# Altium PCB LORA_NODE2.PcbDoc
Units mil, origin at the board's own origin, x right, y up, seen from the top; angles counter-clockwise.
Board outline 3070.87 x 1574.8 mil, 2 copper layers (Top Layer, Bottom Layer); 109 components, 85 nets, 348 pads, 38 vias.
Unrouted connection lines stored in the file: 44.
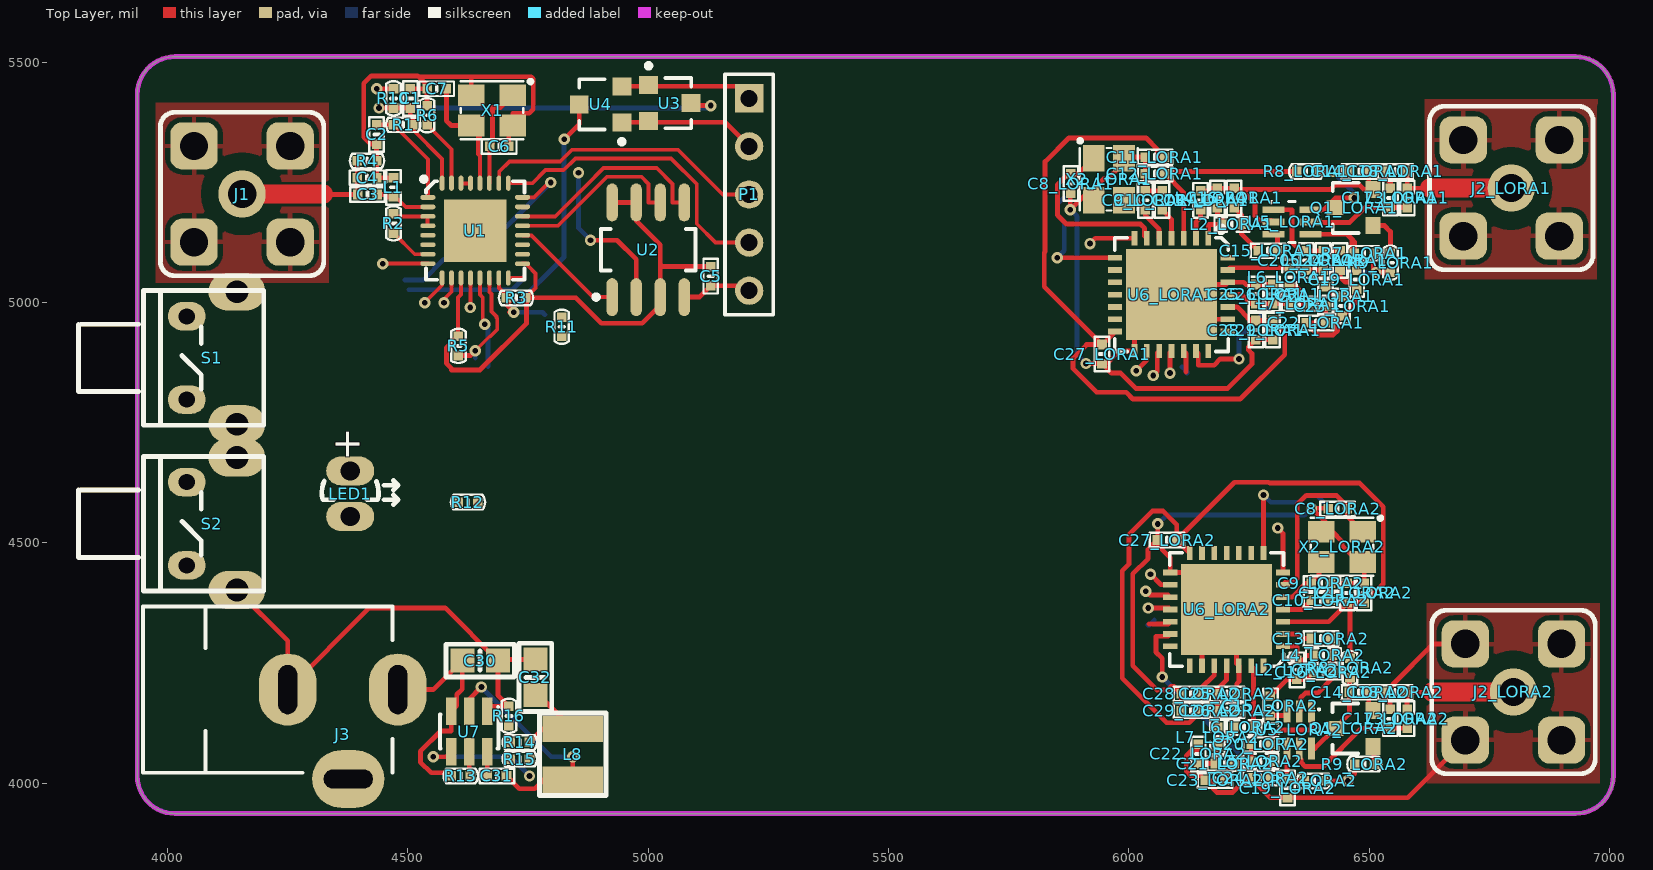
[diagram p0: Top Layer view]
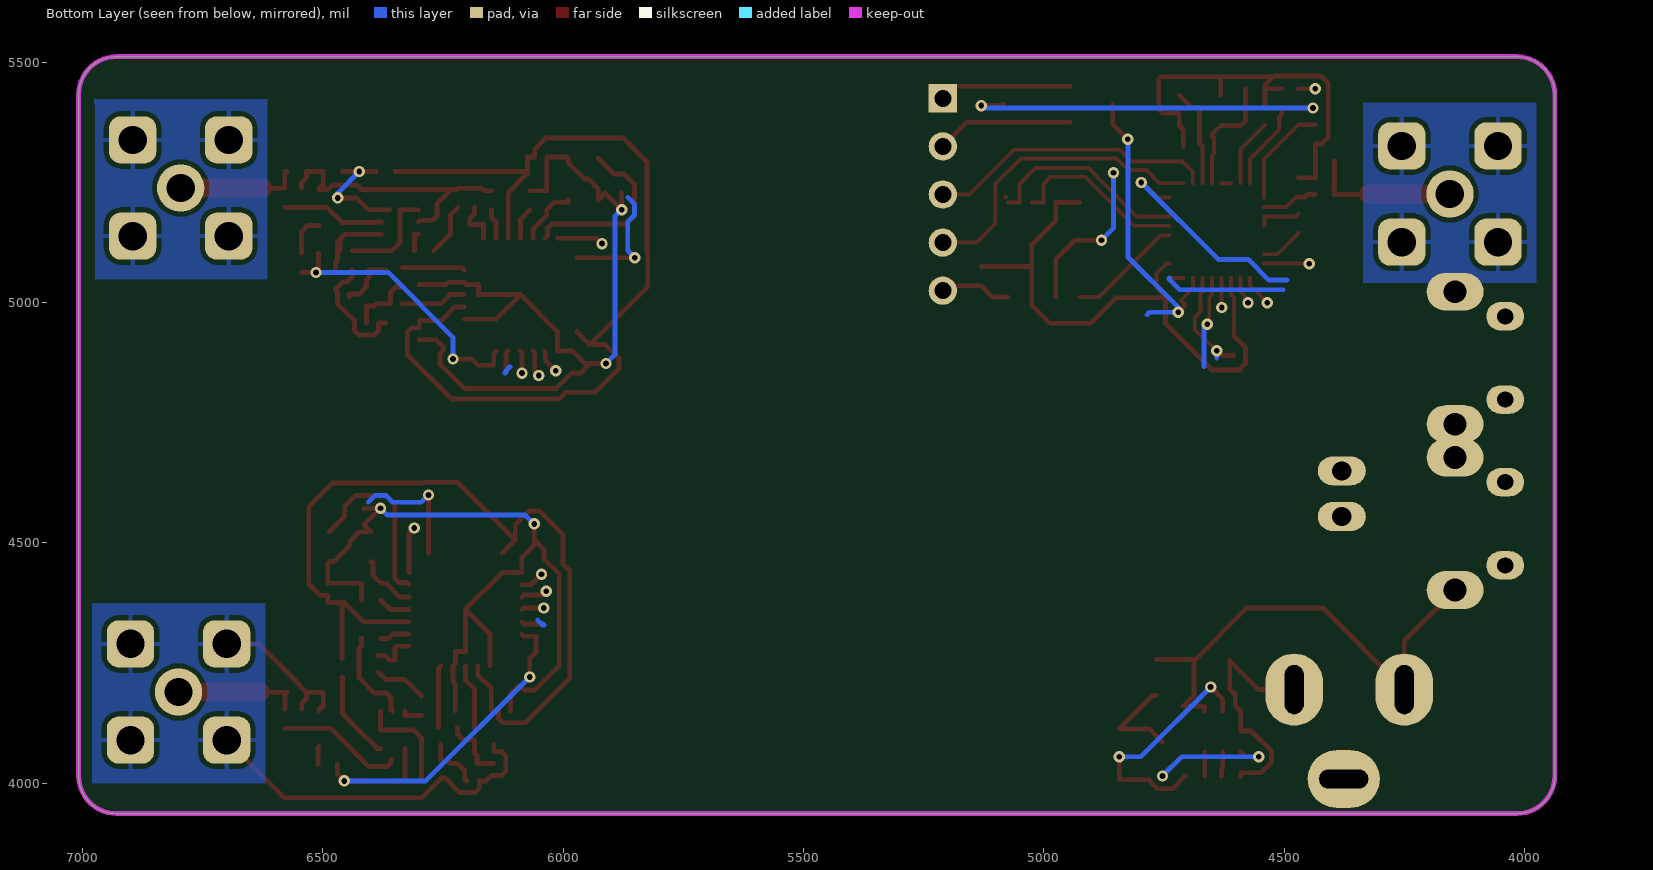
[diagram p1: Bottom Layer view, seen from below]
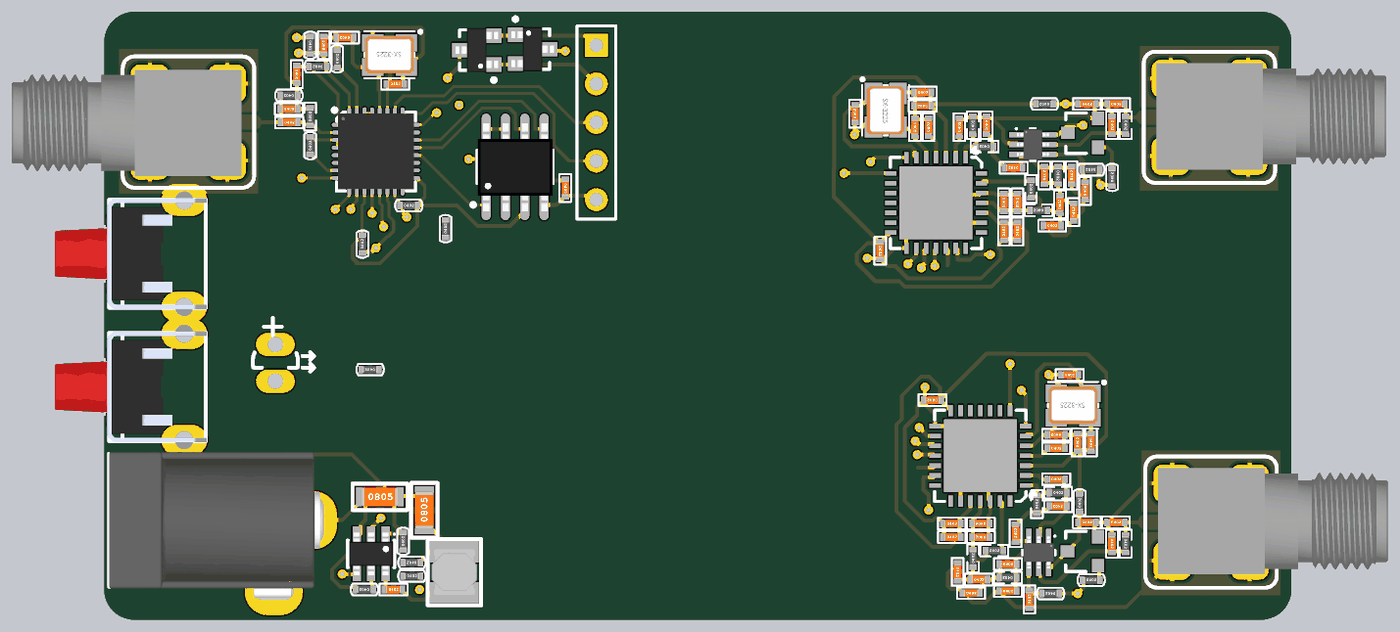
[diagram p2: 3D render of the assembled board from above, using the file's embedded part models]

## Layer stack, top to bottom
Top Solder: solder mask 0.4, Solder Resist, Dk 3.5
Top Layer: signal copper 1.4
Dielectric 1: dielectric 12.6, FR-4, Dk 4.8
Bottom Layer: signal copper 1.4
Bottom Solder: solder mask 0.4, Solder Resist, Dk 3.5

## Board outline
3937.01,4015.75 3937.01,5433.07 cw(c4015.75,5433.07) 4015.75,5511.81 6929.13,5511.81 cw(c6929.13,5433.07) 7007.87,5433.07 7007.87,4015.75 cw(c6929.13,4015.75) 6929.13,3937.01 4015.75,3937.01 cw(c4015.75,4015.75)

## Design rules (kind name [scope] priority, off if disabled: settings)
Clearance [All] p1: gap=10 ignorepadtopadclearanceinfootprint=TRUE except(6: Track-Poly)
PolygonConnect [All] p1: connectstyle=Relief reliefconductorwidth=10 reliefentries=4 polygonreliefangle="90 Angle" airgapwidth=10
RoomDefinition LORA1 [InComponentClass('LORA1')] p1: confinementstyle=ConfineIn formatcopy=TRUE lockcomponents=FALSE outline 5750.59,5443.46 7375.59,5443.46 7375.59,4703.46 5750.59,4703.46
RoutingVias [All] p1: holewidth=11.81 width=23.62 viastyle="Through Hole" minholewidth=3.94 minwidth=11.81 maxholewidth=15.75 maxwidth=31.5
SMDToPlane [All] p1: distance=0
SolderMaskExpansion [All] p1: expansion=4
Width [All] p1: maxlimit=50 minlimit=2 preferedwidth=10
30 further rules are at their usual default settings.

## Classes and differential pairs
component class LORA1: C8_LORA1 C9_LORA1 C10_LORA1 C11_LORA1 C12_LORA1 C13_LORA1 C14_LORA1 C15_LORA1 C16_LORA1 C17_LORA1 C18_LORA1 C19_LORA1 C20_LORA1 C21_LORA1 C22_LORA1 C23_LORA1 C24_LORA1 C25_LORA1 C26_LORA1 C27_LORA1 C28_LORA1 C29_LORA1 J2_LORA1 L2_LORA1 L3_LORA1 L4_LORA1 L5_LORA1 L6_LORA1 L7_LORA1 Q1_LORA1 R7_LORA1 R8_LORA1 R9_LORA1 U5_LORA1 U6_LORA1 X2_LORA1
component class LORA2: C8_LORA2 C9_LORA2 C10_LORA2 C11_LORA2 C12_LORA2 C13_LORA2 C14_LORA2 C15_LORA2 C16_LORA2 C17_LORA2 C18_LORA2 C19_LORA2 C20_LORA2 C21_LORA2 C22_LORA2 C23_LORA2 C24_LORA2 C25_LORA2 C26_LORA2 C27_LORA2 C28_LORA2 C29_LORA2 J2_LORA2 L2_LORA2 L3_LORA2 L4_LORA2 L5_LORA2 L6_LORA2 L7_LORA2 Q1_LORA2 R7_LORA2 R8_LORA2 R9_LORA2 U5_LORA2 U6_LORA2 X2_LORA2
component class U_02_ESP8266: C1 C2 C3 C4 C5 C6 C7 J1 L1 P1 R1 R2 R3 R4 R5 R6 U1 U2 U3 U4 X1
component class U_04_KEY: LED1 R10 R11 R12 S1 S2
component class U_05_POWER: C30 C31 C32 J3 L8 R13 R14 R15 R16 U7
channel class 03_LORA: LORA1 LORA2

## Components (designator, comment, footprint, x,y, rotation, side; value= is the part's Value field where it differs from the comment)
C1 "1uF" SMT_C_0402 4505,5425 r90 top
C2 "0.1uF" SMT_C_0402 4435,5350 r270 top
C3 "8.6pF" SMT_C_0402 4416,5225 r0 top
C4 "2.4pF" SMT_C_0402 4415,5260 r0 top
C5 "100nF" SMT_C_0402 5130,5055 r270 top
C6 "3.9pF" SMT_C_0402 4690,5325 r0 top
C7 "3.9pF" SMT_C_0402 4560,5445 r180 top
C8_LORA1 "15pF" SMT_C_0402 5879.09,5247.87 r90 top (schematic designator C8)
C8_LORA2 "15pF" SMT_C_0402 6434.41,4571.18 r0 top (schematic designator C8)
C9_LORA1 "15pF" SMT_C_0402 6034.09,5212.87 r270 top (schematic designator C9)
C9_LORA2 "15pF" SMT_C_0402 6399.41,4416.18 r180 top (schematic designator C9)
C10_LORA1 "100nF" SMT_C_0402 6069.09,5212.87 r90 top (schematic designator C10)
C10_LORA2 "100nF" SMT_C_0402 6399.41,4381.18 r0 top (schematic designator C10)
C11_LORA1 "47pF" SMT_C_0402 6054.09,5302.87 r0 top (schematic designator C11)
C11_LORA2 "47pF" SMT_C_0402 6489.41,4396.18 r270 top (schematic designator C11)
C12_LORA1 "100nF" SMT_C_0402 6054.09,5267.87 r180 top (schematic designator C12)
C12_LORA2 "100nF" SMT_C_0402 6454.41,4396.18 r90 top (schematic designator C12)
C13_LORA1 "100nF" SMT_C_0402 6149.09,5212.87 r90 top (schematic designator C13)
C13_LORA2 "100nF" SMT_C_0402 6399.41,4301.18 r0 top (schematic designator C13)
C14_LORA1 "100pF" SMT_C_0402 6479.09,5272.87 r0 top (schematic designator C14)
C14_LORA2 "100pF" SMT_C_0402 6478.82,4189.41 r0 top (schematic designator C14)
C15_LORA1 "47pF" SMT_C_0402 6289.09,5107.87 r180 top (schematic designator C15)
C15_LORA2 "47pF" SMT_C_0402 6294.41,4161.18 r90 top (schematic designator C15)
C16_LORA1 "NC" SMT_C_0402 6219.09,5217.87 r270 top (schematic designator C16)
C16_LORA2 "NC" SMT_C_0402 6404.41,4231.18 r180 top (schematic designator C16)
C17_LORA1 "NC" SMT_C_0402 6544.09,5217.87 r270 top (schematic designator C17)
C17_LORA2 "NC" SMT_C_0402 6543.82,4134.41 r270 top (schematic designator C17)
C18_LORA1 "NC" SMT_C_0402 6554.09,5272.87 r0 top (schematic designator C18)
C18_LORA2 "NC" SMT_C_0402 6553.82,4189.41 r0 top (schematic designator C18)
C19_LORA1 "100pF" SMT_C_0402 6474.09,5047.87 r90 top (schematic designator C19)
C19_LORA2 "100pF" SMT_C_0402 6330,3990 r90 top (schematic designator C19)
C20_LORA1 "2.7pF" SMT_C_0402 6369.09,5087.87 r90 top (schematic designator C20)
C20_LORA2 "2.7pF" SMT_C_0402 6274.41,4081.18 r0 top (schematic designator C20)
C21_LORA1 "47pF" SMT_C_0402 6409.09,5012.87 r90 top (schematic designator C21)
C21_LORA2 "47pF" SMT_C_0402 6199.41,4041.18 r0 top (schematic designator C21)
C22_LORA1 "4.7pF" SMT_C_0402 6389.09,4957.87 r0 top (schematic designator C22)
C22_LORA2 "4.7pF" SMT_C_0402 6144.41,4061.18 r270 top (schematic designator C22)
C23_LORA1 "6.8pF" SMT_C_0402 6444.09,4992.87 r90 top (schematic designator C23)
C23_LORA2 "6.8pF" SMT_C_0402 6179.41,4006.18 r0 top (schematic designator C23)
C24_LORA1 "6.8pF" SMT_C_0402 6439.09,5087.87 r90 top (schematic designator C24)
C24_LORA2 "6.8pF" SMT_C_0402 6274.41,4011.18 r0 top (schematic designator C24)
C25_LORA1 "47pF" SMT_C_0402 6264.09,5017.87 r270 top (schematic designator C25)
C25_LORA2 "47pF" SMT_C_0402 6204.41,4186.18 r180 top (schematic designator C25)
C26_LORA1 "10nF" SMT_C_0402 6299.09,5017.87 r270 top (schematic designator C26)
C26_LORA2 "10nF" SMT_C_0402 6204.41,4151.18 r180 top (schematic designator C26)
C27_LORA1 "100nF" SMT_C_0402 5944.09,4892.87 r270 top (schematic designator C27)
C27_LORA2 "100nF" SMT_C_0402 6079.41,4506.18 r180 top (schematic designator C27)
C28_LORA1 "47pF" SMT_C_0402 6264.09,4942.87 r90 top (schematic designator C28)
C28_LORA2 "47pF" SMT_C_0402 6129.41,4186.18 r0 top (schematic designator C28)
C29_LORA1 "100nF" SMT_C_0402 6299.09,4942.87 r90 top (schematic designator C29)
C29_LORA2 "100nF" SMT_C_0402 6129.41,4151.18 r0 top (schematic designator C29)
C30 "22uF 25V" SMT_C_0805 4650.2,4255.35 r0 top
C31 "1uF" SMT_C_0402 4685.2,4015.35 r0 top
C32 "22uF" SMT_C_0805 4765.2,4220.35 r90 top
J1 "SMA-60-12-5M8-049" SMA-60-12-5M8-049 4155,5226 r90 top
J2_LORA1 "SMA-60-12-5M8-049" SMA-60-12-5M8-049 6795.59,5238.46 r270 top (schematic designator J2)
J2_LORA2 "SMA-60-12-5M8-049" SMA-60-12-5M8-049 6800,4190 r270 top (schematic designator J2)
J3 "DC-JACK" DC-JACK-6.2mm 4479,4195 r180 top
L1 "1nH" SMT_L_0402 4470,5240 r90 top
L2_LORA1 "4.7pF" SMT_L_0402 6214.09,5162.87 r180 top (schematic designator L2)
L2_LORA2 "4.7pF" SMT_L_0402 6349.41,4236.18 r90 top (schematic designator L2)
L3_LORA1 "47pF" SMT_L_0402 6579.09,5217.87 r270 top (schematic designator L3)
L3_LORA2 "47pF" SMT_L_0402 6578.82,4134.41 r270 top (schematic designator L3)
L4_LORA1 "18nH" SMT_L_0402 6184.09,5217.87 r90 top (schematic designator L4)
L4_LORA2 "18nH" SMT_L_0402 6404.41,4266.18 r0 top (schematic designator L4)
L5_LORA1 "12nH" SMT_L_0402 6404.09,5087.87 r270 top (schematic designator L5)
L5_LORA2 "12nH" SMT_L_0402 6274.41,4046.18 r180 top (schematic designator L5)
L6_LORA1 "2.2nH" SMT_L_0402 6334.09,5052.87 r90 top (schematic designator L6)
L6_LORA2 "2.2nH" SMT_L_0402 6239.41,4116.18 r0 top (schematic designator L6)
L7_LORA1 "82nH" SMT_L_0402 6354.09,4997.87 r180 top (schematic designator L7)
L7_LORA2 "82nH" SMT_L_0402 6184.41,4096.18 r90 top (schematic designator L7)
L8 "4.7uH" SMT_L_3.3mm 4842.95,4060.35 r270 top
LED1 "直插LED-3mm" 直插LED-3mm 4380,4650 r270 top
P1 "Header 5" HDR1X5 5210,5425 r270 top
Q1_LORA1 "2SC3356" SOT-23S 6468.46,5197.87 r90 top (schematic designator Q1)
Q1_LORA2 "2SC3356" SOT-23S 6468.19,4114.41 r90 top (schematic designator Q1)
R1 "12K" SMT_R_0402 4490,5370 r180 top
R2 "12K" SMT_R_0402 4470,5165 r90 top
R3 "12K" SMT_R_0402 4725,5010 r0 top
R4 "12K" SMT_R_0402 4415,5295 r180 top
R5 "1K" SMT_R_0402 4605,4910 r90 top
R6 "12K" SMT_R_0402 4540,5390 r90 top
R7_LORA1 "10K" SMT_R_0402 6489.09,5102.87 r180 top (schematic designator R7)
R7_LORA2 "10K" SMT_R_0402 6385,4005 r180 top (schematic designator R7)
R8_LORA1 "1M" SMT_R_0402 6369.09,5272.87 r180 top (schematic designator R8)
R8_LORA2 "1M" SMT_R_0402 6460,4240 r90 top (schematic designator R8)
R9_LORA1 "1K" SMT_R_0402 6544.09,5082.87 r90 top (schematic designator R9)
R9_LORA2 "1K" SMT_R_0402 6490,4040 r0 top (schematic designator R9)
R10 "470" SMT_R_0402 4470,5425 r270 top
R11 "470" SMT_R_0402 4820,4950 r90 top
R12 "470" SMT_R_0402 4625,4585 r180 top
R13 "100k" SMT_R_0402 4610.2,4015.35 r180 top
R14 "47k 1%" SMT_R_0402 4732.95,4085.35 r180 top
R15 "75k 1%" SMT_R_0402 4732.95,4050.35 r0 top
R16 "15k 1%" SMT_R_0402 4710.2,4140.35 r90 top
S1 "按键开关-6x6-卧式-直插" 按键开关-6x6-卧式-直插 4040,4885 r180 top
S2 "按键开关-6x6-卧式-直插" 按键开关-6x6-卧式-直插 4040,4540 r180 top
U1 "ESP8266" QFN32 4640,5150 r0 top
U2 "W25Qxx" SOP-8 5000,5110 r90 top
U3 "DTC143" SOT23-3 5045,5415 r270 top
U4 "DTC143" SOT23-3 4900.71,5412.6 r90 top
U5_LORA1 "UPG2179" SC70-6 6339.09,5167.87 r0 top (schematic designator U5)
U5_LORA2 "UPG2179" SC70-6 6354.41,4111.18 r270 top (schematic designator U5)
U6_LORA1 "SX1278" QFN28-6x6 6088.5,5016.69 r270 top (schematic designator U6)
U6_LORA2 "SX1278" QFN28-6x6 6203.23,4361.77 r180 top (schematic designator U6)
U7 "MP1470" SOT23-6 4627.6,4107.68 r180 top
X1 "26MHz" SMT_XTAL_3225 4675,5400 r180 top
X2_LORA1 "32MHz" SMT_XTAL_3225 5958.5,5256.69 r270 top (schematic designator X2)
X2_LORA2 "32MHz" SMT_XTAL_3225 6443.23,4491.77 r180 top (schematic designator X2)

## Footprints (in the part's own frame and the unit in brackets; to place one, negate y for a bottom-side part, rotate by r counter-clockwise, add the part's x,y. Pads: shape width x height; smd on the part's side, far side on the other; paste and mask are expansions set on the pad)
DC-JACK-6.2mm [mil] "DC-JACK-6.2mm"
  oval 120x150 hole 39.37 slot 102 at 90 deg: 1(0,0) 2(229,0)
  oval 150x120 hole 39.37 slot 102 at 0 deg: 3(103,186)
  silkscreen extent 11,-173 530,173, body extent -26,-177 529,201, height 453
HDR1X5 [mm] "Connector; Header; 5 Position"
  rect 1.5x1.5 hole 0.9: 1(0,0)
  round 1.5 hole 0.9: 2(2.54,0) 3(5.08,0) 4(7.62,0) 5(10.16,0)
  silkscreen extent -1.27,-1.27 11.43,1.27
QFN28-6x6 [mm]
  rect 4.8x4.8 smd: 0(0,0)
  rect 0.75x0.3 smd: 1(-2.975,1.95) 2(-2.975,1.3) 3(-2.975,0.65) 4(-2.975,0) 5(-2.975,-0.65) 6(-2.975,-1.3) 7(-2.975,-1.95) 15(2.975,-1.95) 16(2.975,-1.3) 17(2.975,-0.65) 18(2.975,0) 19(2.975,0.65) 20(2.975,1.3) 21(2.975,1.95)
  rect 0.3x0.75 smd: 8(-1.95,-2.975) 9(-1.3,-2.975) 10(-0.65,-2.975) 11(0,-2.975) 12(0.65,-2.975) 13(1.3,-2.975) 14(1.95,-2.975) 22(1.95,2.975) 23(1.3,2.975) 24(0.65,2.975) 25(0,2.975) 26(-0.65,2.975) 27(-1.3,2.975) 28(-1.95,2.975)
  silkscreen extent -3.61,-3 3,3, body extent -3,-3 3,3, height 1.01
QFN32 [mm] "32-Pin Quad Flat No-Lead 0.5 mm Pitch, IPC High Density"
  oval 0.8x0.25 smd: 1(-2.5,1.75) 2(-2.5,1.25) 3(-2.5,0.75) 4(-2.5,0.25) 5(-2.5,-0.25) 6(-2.5,-0.75) 7(-2.5,-1.25) 8(-2.5,-1.75) 17(2.5,-1.75) 18(2.5,-1.25) 19(2.5,-0.75) 20(2.5,-0.25) 21(2.5,0.25) 22(2.5,0.75) 23(2.5,1.25) 24(2.5,1.75)
  oval 0.25x0.8 smd: 9(-1.75,-2.5) 10(-1.25,-2.5) 11(-0.75,-2.5) 12(-0.25,-2.5) 13(0.25,-2.5) 14(0.75,-2.5) 15(1.25,-2.5) 16(1.75,-2.5) 25(1.75,2.5) 26(1.25,2.5) 27(0.75,2.5) 28(0.25,2.5) 29(-0.25,2.5) 30(-0.75,2.5) 31(-1.25,2.5) 32(-1.75,2.5)
  rect 3.3x3.3 smd paste-2.54: 33(0,0)
  silkscreen extent -2.84,-2.6 2.6,2.84, body extent -2.51,-2.51 2.51,2.51, height 0.8
SC70-6 [mil] "SC70/SOT-323 (DCK) Package. 6-Lead Plastic SC70."
  rect 46x14 smd: 1(-38.5,25.59) 2(-38.5,0) 3(-38.5,-25.59) 4(38.5,-25.59) 5(38.5,0) 6(38.5,25.59)
  silkscreen extent -44,-42 7,42, body extent -41,-39 41,39, height 36
SMA-60-12-5M8-049 [mm] "SMA-60-12-5M8-049"
  round 2.5 hole 1.5: 1(0,0)
  rrect50% 2.5x2.5 hole 1.5: 2(-2.54,2.54) 3(2.54,2.54) 4(2.54,-2.54) 5(-2.54,-2.54)
  silkscreen extent -4.32,-4.32 4.32,4.32, body extent -3.56,-3.49 3.44,11.61, height 10.86
SMT_C_0402 [mil] "Surface mount capacitor 0402"
  rect 20x20 smd: 1(-20,0) 2(20,0)
  silkscreen extent -36,-15 36,15, body extent -20,-10 20,10, height 20
SMT_C_0805 [mil] "Surface mount capacitor 0805"
  rect 50x50 smd: 1(-37,0) 2(37,0)
  silkscreen extent -71,-34 71,34, body extent -49,-24 49,25, height 31
SMT_L_3.3mm [mm] "LPO3310 SMT Power Inductor, 3.3x3.3x1mm"
  rect 1.4x3.2 smd: 1(-1.34,0) 2(1.34,0)
  silkscreen extent -2.18,-1.75 2.18,1.75, body extent -1.5,-1.5 1.5,1.5, height 1
SMT_L_0402 [mil] "Surface mount inductor 0402"
  rect 20x20 smd: 1(-20,0) 2(20,0)
  silkscreen extent -36,-15 36,15, body extent -20,-10 20,10, height 20
SMT_R_0402 [mil] "Surface mount resistor 0402"
  rect 20x20 smd: 1(-20,0) 2(20,0)
  silkscreen extent -36,-15 36,15, body extent -20,-10 20,10, height 20
SMT_XTAL_3225 [mm] "Quartz Crystal, SM; Body 3.2 x 2.5 mm"
  rect 1.4x1.15 smd: 1(-1.1,-0.8) 2(1.1,-0.8) 3(1.1,0.8) 4(-1.1,0.8)
  silkscreen extent -2.13,-1.62 1.65,1.52, body extent -1.6,-1.27 1.6,1.23, height 0.81
SOP-8 [mm] "8-Pin Small Outline Integrated Circuit 1.27 mm Pitch, IPC Low Density"
  oval 2x0.6 smd: 1(-2.5,1.905) 2(-2.5,0.635) 3(-2.5,-0.635) 4(-2.5,-1.905) 5(2.5,-1.905) 6(2.5,-0.635) 7(2.5,0.635) 8(2.5,1.905)
  silkscreen extent -2.62,-2.5 1.1,2.88, body extent -2.92,-2.45 2.86,2.45, height 1.45
SOT23-3 [mm] "SOT-23; 3 Leads; Body 3.0 x 2.5 mm, inc. leads (LxW max)"
  rect 0.95x1 smd: 1(-0.95,-1.125) 2(0.95,-1.125) 3(0,1.125)
  silkscreen extent -2.1,-1.25 1.33,1.13, body extent -1.45,-1.4 1.45,1.4, height 1.3
SOT23-6 [mm] "SOT-457/SC-74; 6 Leads; Body 3 x 3 mm, inc. leads (LxW max)"
  rect 0.55x1.45 smd: 1(-0.95,-1.075) 2(0,-1.075) 3(0.95,-1.075) 4(0.95,1.075) 5(0,1.075) 6(-0.95,1.075)
  silkscreen extent -1.58,-1.35 1.55,0.9, body extent -1.45,-1.4 1.45,1.4, height 1.45
SOT-23S [mm]
  rect 0.9x0.8 smd: 1(-0.95,-1) 2(0.95,-1)
  rect 0.8x0.9 smd: 3(0,1)
  silkscreen extent -1.34,-0.22 1.31,1.12, body extent -1.16,-1.31 1.15,1.3, height 0.38
按键开关-6x6-卧式-直插 [mm] "按键开关-6x6-卧式-直插"
  oval 2x1.5 hole 0.85: 1(0,-2.2) 2(0,2.2)
  oval 3x2 hole 1.2: 3(-2.65,3.5) 4(-2.65,-3.5)
  silkscreen extent -4.06,-3.56 5.71,3.56, body extent -4.13,-4.18 5.84,4.18, height 7.37
直插LED-3mm [mil] "直插LED"
  oval 60x100 hole 40: 1(0,0) 2(95,0)
  silkscreen extent 20,-59 70,100

## Part data
C1 C2 C3 C4 C6 C7 C8_LORA1 C8_LORA2 C9_LORA1 C9_LORA2 C10_LORA1 C10_LORA2 C11_LORA1 C11_LORA2 C12_LORA1 C12_LORA2 C13_LORA1 C13_LORA2 C14_LORA1 C14_LORA2 C15_LORA1 C15_LORA2 C16_LORA1 C16_LORA2 C17_LORA1 C17_LORA2 C18_LORA1 C18_LORA2 C19_LORA1 C19_LORA2 C20_LORA1 C20_LORA2 C21_LORA1 C21_LORA2 C22_LORA1 C22_LORA2 C23_LORA1 C23_LORA2 C24_LORA1 C24_LORA2 C25_LORA1 C25_LORA2 C26_LORA1 C26_LORA2 C27_LORA1 C27_LORA2 C28_LORA1 C28_LORA2 C29_LORA1 C29_LORA2: library part SMT_C_0402_1, "Surface mount capacitor 0402"
C5 C31: library part SMT_C_0402, "Surface mount capacitor 0402"
C30 C32: library part SMT_C_0805, "Surface mount capacitor 0805"
J1 J2_LORA1 J2_LORA2: "sma 60-12-5M8-049"
J3: "电源插孔"
L1 L2_LORA1 L2_LORA2 L3_LORA1 L3_LORA2 L4_LORA1 L4_LORA2 L5_LORA1 L5_LORA2 L6_LORA1 L6_LORA2 L7_LORA1 L7_LORA2: library part SMT_L_0402, "Surface mount inductor 0402"
L8: library part SMT_L_3.3mm, "LPO3310 SMT Power Inductor, 3.3x3.3x1mm"
P1: "Header, 5-Pin", LatestRevisionDate=17-Jul-2002, LatestRevisionNote="Re-released for DXP Platform.", Publisher="Altium Limited"
Q1_LORA1 Q1_LORA2: library part NPN, "NPN Bipolar Transistor", Code_JEDEC=TO-226-AA, LatestRevisionDate=17-Jul-2002, LatestRevisionNote="Re-released for DXP Platform.", PackageDescription="TO, Flat Index; 3 In-Line, Axial Leads; Body Dia. 4.8mm; Leads 0.55 x 0.51 mm (max)", PackageReference=TO-226-AA, Published=8-Jun-2000, Publisher="Altium Limited"
R1 R2 R3 R4 R5 R6 R7_LORA1 R7_LORA2 R8_LORA1 R8_LORA2 R9_LORA1 R9_LORA2 R10 R11 R12 R13 R14 R15 R16: library part SMT_R_0402, "Surface mount resistor 0402"
U2: "Serial flash memory with dual and quad SPI"
U3 U4: "Digital transistors (built-in resistors)"
U7: "High-Efficiency, 2A, 16V, 500kHz  Synchronous, Step-Down Converter"
X1 X2_LORA1 X2_LORA2: library part SMT_XTAL_PASSIVE, "Passive crystal"

## Via types
v1: diameter 23.62, hole 11.81, Top Layer to Bottom Layer, 38 vias

## Nets (pads, with @x,y where several pads share a name; then routed paths per layer and width w, separated by ;. In a path a pad name is that pad's centre, name@x,y a point inside that pad or via, vN(x,y) a via of type N, cw(c..) or ccw(c..) an arc to the next point about the centre after c; other vN are vias at no path point)
ADC: U1.6
ANT: C3.1 C4.1 J1.1 R4.2 | length 310.4
  Top Layer w10: 4326,5225 C3.1 4396,5243 4395,5244 C4.1 R4.2
  Top Layer w39: J1.1 4325,5226
ANT_LORA1: C18_LORA1.2 J2_LORA1.1 L3_LORA1.1 | length 256.7
  Top Layer w10: C18_LORA1.2 6579.09,5272.87 L3_LORA1.1 6625,5237.87 6625.59,5238.46
  Top Layer w39: 6625.59,5238.46 J2_LORA1.1
ANT_LORA2: C18_LORA2.2 J2_LORA2.1 L3_LORA2.1 | length 261.4
  Top Layer w10: C18_LORA2.2 C18_LORA2.2@6578.82,4189.41 ; L3_LORA2.1 C18_LORA2.2@6578.82,4189.41 ; 6630,4190 6629.41,4189.41 C18_LORA2.2@6578.82,4189.41
  Top Layer w39: 6630,4190 J2_LORA2.1
CLK: U1.21 U2.6 | length 373.3
  Top Layer w8: U1.21 4812.35,5159.84 4914.31,5261.8 4985.69,5261.8 5000.81,5246.68 5000.81,5208.43 U2.6
CS: U1.20 U2.1 | length 239.8
  Top Layer w8: U1.20 4739.19,5139.39 4757.09,5139.39 4884.91,5011.57 U2.1
D0: U1.22 U2.5 | length 432
  Top Layer w8: U1.22 4806.58,5179.53 4871.03,5243.97 4906.85,5279.8 5017.69,5279.8 5050.81,5246.68 5050.81,5208.43 U2.5 ; U2.5@5078.04,5220 U2.5@5080,5220
D1: U1.23 U2.2 | length 340.3
  Top Layer w10: v1(4880,5130) 4935,5130 4975,5090 U2.2
  Bottom Layer w10: v1(4855,5270) 4855,5155 v1(4880,5130)
DIO0_LORA1: U1.24 U6_LORA1.8 | length 723.5
  Top Layer w8: U1.24 4762.4,5218.9 4793.5,5250 v1(4797.08,5250)
  Top Layer w10: v1(5850.59,5093.46) 5968.1,5093.46 U6_LORA1.8
  Bottom Layer w10: 4493.53,5046.81 4531.81,5046.81 4575,5090 4637.08,5090 v1(4797.08,5250) ; v1(5850.59,5093.46) 5865.59,5108.46 5865.59,5168.06 5851.3,5182.36 5851.3,5204.57 5865.59,5218.86
DIO0_LORA2: U1.16 U6_LORA2.8 | length 543.8
  Top Layer w8: U1.16 4738.43,5051.57
  Top Layer w10: U6_LORA2.8 6280,4482.17 v1(6280,4599.68)
  Bottom Layer w10: 4501.81,5026.81 4716.81,5026.81 4740,5050 4738.43,5051.57 ; v1(6280,4599.68) 6295,4584.68 6354.6,4584.68 6368.89,4598.97 6391.11,4598.97 6405.4,4584.68
DIO1_LORA1: U6_LORA1.9
DIO1_LORA2: U6_LORA2.9
DIO2_LORA1: U6_LORA1.10
DIO2_LORA2: U6_LORA2.10
DIO3_LORA1: U6_LORA1.11
DIO3_LORA2: U6_LORA2.11
DIO4_LORA1: U6_LORA1.12
DIO4_LORA2: U6_LORA2.12
DIO5_LORA1: U6_LORA1.13
DIO5_LORA2: U6_LORA2.13
DTR: P1.1 U3.1 U4.2 | length 275.4
  Top Layer w10: U4.2 5185,5450 P1.1
EN: R2.1 U1.7 | length 89.9
  Top Layer w8: R2.1 4514.21,5100.79 U1.7
GND: C1.2 C2.2 C4.2 C5.2 C6.2 C7.2 C8_LORA1.1 C8_LORA2.1 C9_LORA1.1 C9_LORA2.1 C10_LORA1.2 C10_LORA2.2 C11_LORA1.1 C11_LORA2.1 C12_LORA1.2 C12_LORA2.2 C13_LORA1.2 C13_LORA2.2 C14_LORA1.2 C14_LORA2.2 C16_LORA1.1 C16_LORA2.1 C17_LORA1.1 C17_LORA2.1 C18_LORA1.1 C18_LORA2.1 C19_LORA1.1 C19_LORA2.1 C22_LORA1.1 C22_LORA2.1 C23_LORA1.1 C23_LORA2.1 C24_LORA1.1 C24_LORA2.1 C25_LORA1.1 C25_LORA2.1 C26_LORA1.1 C26_LORA2.1 C27_LORA1.2 C27_LORA2.2 C28_LORA1.1 C28_LORA2.1 C29_LORA1.1 C29_LORA2.1 C30.2 C32.2 J1.2 J1.3 J1.4 J1.5 J2_LORA1.2 J2_LORA1.3 J2_LORA1.4 J2_LORA1.5 J2_LORA2.2 J2_LORA2.3 J2_LORA2.4 J2_LORA2.5 J3.2 L1.2 L4_LORA1.2 L4_LORA2.2 P1.5 Q1_LORA1.2 Q1_LORA2.2 R4.1 R6.2 R16.2 S1.2 S1.3 S1.4 S2.2 S2.3 S2.4 U1.33 U2.4 U5_LORA1.2 U5_LORA2.2 U6_LORA1.0 U6_LORA1.15 U6_LORA1.23 U6_LORA1.26 U6_LORA2.0 U6_LORA2.15 U6_LORA2.23 U6_LORA2.26 U7.1 X1.2 X1.4 X2_LORA1.2 X2_LORA1.4 X2_LORA2.2 X2_LORA2.4 | length 7886.6
  Top Layer w10: S2.3 4250,4296.53 J3.2 4420,4365 4577.55,4365 C30.2 ; L1.2 C4.2 R4.1 C2.2 4422.5,5330 4408.19,5344.31 4408.19,5456.11 4423.89,5471.81 4520.69,5471.81 4522.5,5470 ; C1.2 C7.2 ; R6.2 C7.2 ; X1.2 4631.69,5466.69 4635,5470 ; U7.1 4665,4160.35 R16.2 4687.2,4183.35 C30.2 ; C6.2 4710,5360.2 X1.4 4718.31,5393.86 4752.08,5393.86 4760.87,5402.65 4760.87,5465.61 4756.47,5470 4635,5470 ; C32.2 4687.2,4257.35 C30.2 ; U2.4 5106.57,5011.57 C5.2 5200,5035 P1.5 ; C8_LORA1.1 5878.11,5226.89 v1(5878.11,5193.46) 5912.52,5227.87 X2_LORA1.2 5927.01,5237.01 5947.44,5257.44 5955.86,5257.44 5989.09,5290.68 5989.09,5299.09 X2_LORA1.4 5992.87,5302.87 C11_LORA1.1 C12_LORA1.2 C9_LORA1.1 C10_LORA1.2 ; v1(5910.59,4873.46) C27_LORA1.2@5943.5,4873.46 ; v1(6060,4539.68) C27_LORA2.2@6060,4506.77 ; C29_LORA2.1 C28_LORA2.1 6094.41,4201.18 6087.33,4201.18 6080.52,4194.37 6058.3,4194.37 6008.19,4244.48 6008.19,4435.79 6040,4467.6 6040,4486.77 C27_LORA2.2 C27_LORA2.2@6060,4506.77 ; C22_LORA2.1 6144.41,4066.18 6128.2,4066.18 6119.41,4057.39 6119.41,4024.97 6128.2,4016.18 6149.41,4016.18 C23_LORA2.1 6159.41,4004.97 6174.41,4004.97 6174.41,3989.97 6183.2,3981.18 6215.62,3981.18 6245.62,4011.18 C24_LORA2.1 6254.41,4009.97 6294.38,3970 C19_LORA2.1 6580,3970 J2_LORA2.4 ; C13_LORA1.2 6164.09,5232.87 6169.09,5237.87 L4_LORA1.2 C16_LORA1.1 6221.69,5235.27 6233.19,5235.27 ; U6_LORA2.23 6152.05,4310.59 U6_LORA2.0 ; U6_LORA1.23 6139.69,4965.51 U6_LORA1.0 ; C26_LORA2.1 C25_LORA2.1 6224.41,4206.77 6228.82,4211.18 U6_LORA2.26 6224.14,4249.33 6224.14,4274.41 6203.23,4274.41 U6_LORA2.0 ; C29_LORA1.1 C28_LORA1.1 6249.09,4907.87 6249.09,4900.79 6255.9,4893.98 6255.9,4871.77 6205.79,4821.65 6014.49,4821.65 5982.68,4853.46 5963.5,4853.46 C27_LORA1.2 C27_LORA1.2@5943.5,4873.46 ; C26_LORA1.1 C25_LORA1.1 6243.5,5037.87 6239.09,5042.28 U6_LORA1.26 6200.95,5037.6 6175.87,5037.6 6175.87,5016.69 U6_LORA1.0 ; U5_LORA1.2 6297,5171.46 6271.38,5171.46 6262.59,5180.25 6262.59,5205.87 6233.19,5235.27 ; U5_LORA2.2 6358,4153.27 6358,4178.89 6366.79,4187.68 6392.41,4187.68 6424.41,4219.68 C16_LORA2.1 L4_LORA2.2 6424.41,4281.18 6419.41,4286.18 C13_LORA2.2 ; C22_LORA1.1 6384.09,4957.87 6384.09,4941.66 6392.88,4932.87 6425.31,4932.87 6434.09,4941.66 6434.09,4962.87 C23_LORA1.1 6445.31,4972.87 6469.09,4996.66 6469.09,5022.87 C19_LORA1.1 6459.09,5042.87 6450.09,5042.87 6439.09,5053.87 C24_LORA1.1 ; C8_LORA2.1 6413.43,4572.16 v1(6380,4572.16) 6414.41,4537.75 X2_LORA2.2 6423.55,4523.27 6443.98,4502.83 6443.98,4494.41 6477.21,4461.18 6485.63,4461.18 X2_LORA2.4 6489.41,4457.4 C11_LORA2.1 C12_LORA2.2 C9_LORA2.1 C10_LORA2.2 ; Q1_LORA2.2 6498.15,4161.22 6507.56,4154.41 6498.82,4163.15 C14_LORA2.2 C18_LORA2.1 ; C18_LORA1.1@6534.09,5274.09 C18_LORA1.1 ; C17_LORA2.1 6543.82,4166.41 6533.82,4176.41 C18_LORA2.1 ; C17_LORA1.1 6544.09,5249.87 6534.09,5259.87 C18_LORA1.1 ; J2_LORA2.5 6633.2,4290 6548.82,4205.62 6548.82,4204.41 C18_LORA2.1 ; 4522.5,5470 4635,5470 ; 4522.5,5470 4540,5452.5 C7.2 ; C27_LORA1.2@5943.5,4873.46 5953.5,4873.46 5954.09,4872.87 5980.79,4899.57 U6_LORA1.15 6011.73,4939.92 U6_LORA1.0 ; C27_LORA2.2@6060,4506.77 6060,4496.77 6059.41,4496.18 6086.1,4469.49 U6_LORA2.15 6126.46,4438.54 U6_LORA2.0 ; 6233.19,5235.27 6419.21,5235.27 6428.62,5244.68 6480.2,5244.68 6489.61,5235.27 Q1_LORA1.2 6498.42,5244.68 6507.83,5237.87 6499.09,5246.61 C14_LORA1.2 C18_LORA1.1
  Bottom Layer w10: v1(5878.11,5193.46) 5892.28,5179.29 5892.28,4891.77 v1(5910.59,4873.46) ; v1(6060,4539.68) 6078.31,4557.99 6365.83,4557.99 v1(6380,4572.16)
GPIO0: R3.1 R11.2 U1.15 U4.3 | length 658.5
  Top Layer w8: U1.15 4689.21,5030.59 4715,5004.8 4705,4994.8 4715,4984.8 4710.2,4980 v1(4720,4980)
  Top Layer w10: v1(4825,5340) 4856.42,5371.42 U4.3
  Bottom Layer w10: 4785,4975 4780,4980 v1(4720,4980) 4720,4990 4825,5095 v1(4825,5340)
GPIO16: LED1.2 U1.8 | length 93.7
  Top Layer w8: v1(4447.9,5081.1) U1.8
IO2: R5.1 U1.14 U6_LORA2.19 | length 298.2
  Top Layer w8: v1(4640,4900) 4669.19,4929.19 4670.69,4929.19 4685.81,4944.31 4685.81,4967.69 4684.19,4969.31 4684.19,4971.49 4673.81,4981.87 4673.81,5018.15 4669.53,5022.43 U1.14
  Top Layer w10: R5.1 4630,4890 v1(4640,4900) ; 6041.82,4331.5 6081.42,4331.5 U6_LORA2.19
  Bottom Layer w10: 4640,4885 v1(4640,4900) ; 6041.82,4331.5 6040,4329.68 6042.92,4329.68 6052.92,4339.68
IO9: U1.18
IO10: U1.19
IO12: U1.10 U6_LORA1.17 U6_LORA2.17 | length 170.5
  Top Layer w8: v1(4575,5000) 4575,5006.96 4590.79,5022.75 U1.10
  Top Layer w10: v1(6035,4399.68) 6043.19,4391.49 6081.97,4391.49 U6_LORA2.17 ; v1(6050.59,4848.46) 6058.78,4856.65 6058.78,4895.43 U6_LORA1.17
IO13: U1.12 U6_LORA1.18 U6_LORA2.18 | length 156.3
  Top Layer w8: v1(4630,4990) 4630,5051.42 U1.12
  Top Layer w10: v1(6040,4364.68) 6083.19,4364.68 U6_LORA2.18 ; v1(6085.59,4853.46) 6085.59,4896.66 U6_LORA1.18
IO14: U1.9 U6_LORA1.16 U6_LORA2.16 | length 166.7
  Top Layer w8: v1(4535,5000) 4571.1,5036.1 U1.9
  Top Layer w10: v1(6015.59,4858.46) 6037.32,4880.19 U6_LORA1.16 ; v1(6045,4434.68) 6066.73,4412.95 U6_LORA2.16
IO15: U1.13 U6_LORA1.19 | length 257.6
  Top Layer w8: U1.13 4649.84,5016.66 4655.81,5010.69 4655.81,4959.19 v1(4660,4955)
  Top Layer w10: U6_LORA1.19 6118.78,4894.88 6118.78,4855.28
  Bottom Layer w10: v1(4660,4955) 4666.81,4948.19 4666.81,4866.81 ; 6110.59,4866.38 6120.59,4856.38 6120.59,4853.46 6118.78,4855.28
NetC3_2: C3.2 L1.1 U1.2 | length 116.3
  Top Layer w8: L1.1 4474.8,5220 4495.59,5199.21 U1.2
  Top Layer w10: C3.2 4451,5225 4456,5220 L1.1
NetC6_1: C6.1 U1.27 X1.1 | length 213.4
  Top Layer w8: U1.27 4669.53,5324.53 C6.1
  Top Layer w10: C6.1 4675.75,5330.75 4675.75,5406.14 4692.95,5406.14 X1.1
NetC7_1: C7.1 U1.28 X1.3 | length 255.4
  Top Layer w8: X1.3 4649.84,5350.36 4649.84,5344.64 4646,5344.64 4646,5309.2 4649.84,5305.36 U1.28
  Top Layer w10: C7.1 4580,5378.5 4590,5368.5 X1.3
NetC8_LORA1_2: C8_LORA1.2 U6_LORA1.6 X2_LORA1.1 | length 371.9
  Top Layer w10: C8_LORA1.2@5874.09,5267.87 5851.3,5245.08 5851.3,5182.36 5870.08,5163.58 6023.92,5163.58 6032.64,5154.86 6032.64,5138.5 U6_LORA1.6 ; C8_LORA1.2 5894.88,5267.87 X2_LORA1.1
NetC8_LORA2_2: C8_LORA2.2 U6_LORA2.6 X2_LORA2.1 | length 371.9
  Top Layer w10: U6_LORA2.6 6325.04,4417.64 6341.4,4417.64 6350.12,4426.35 6350.12,4580.2 6368.89,4598.97 6431.62,4598.97 C8_LORA2.2@6454.41,4576.18 ; C8_LORA2.2 6454.41,4555.39 X2_LORA2.1
NetC9_LORA1_2: C9_LORA1.2 U6_LORA1.5 X2_LORA1.3 | length 126.2
  Top Layer w10: X2_LORA1.3 5990,5208.87 6018.09,5208.87 C9_LORA1.2 6034.09,5181.69 6062.91,5152.87 U6_LORA1.5
NetC9_LORA2_2: C9_LORA2.2 U6_LORA2.5 X2_LORA2.3 | length 126.2
  Top Layer w10: U6_LORA2.5 6339.41,4387.36 6368.23,4416.18 C9_LORA2.2 6395.41,4432.18 6395.41,4460.27 X2_LORA2.3
NetC10_LORA1_1: C10_LORA1.1 U6_LORA1.4 | length 67.1
  Top Layer w10: C10_LORA1.1 6088.5,5173.46 U6_LORA1.4
NetC10_LORA2_1: C10_LORA2.1 U6_LORA2.4 | length 67.1
  Top Layer w10: U6_LORA2.4 6360,4361.77 C10_LORA2.1
NetC13_LORA1_1: C13_LORA1.1 U6_LORA1.2 | length 63
  Top Layer w10: U6_LORA1.2 6139.68,5167.87 6149.09,5177.28 C13_LORA1.1
NetC13_LORA2_1: C13_LORA2.1 U6_LORA2.2 | length 63
  Top Layer w10: U6_LORA2.2 6354.41,4310.59 6363.82,4301.18 C13_LORA2.1
NetC14_LORA1_1: C14_LORA1.1 Q1_LORA1.3 R8_LORA1.1 U5_LORA1.6 | length 261.8
  Top Layer w10: U5_LORA1.6@6361.09,5193.46 U5_LORA1.6 6405.68,5193.46 6430.09,5217.87 v1(6469.09,5217.87) ; R8_LORA1.1 v1(6424.09,5272.87) C14_LORA1.1
  Bottom Layer w10: v1(6424.09,5272.87) 6469.09,5227.87 v1(6469.09,5217.87)
NetC14_LORA2_1: C14_LORA2.1 Q1_LORA2.3 R8_LORA2.1 U5_LORA2.6 | length 184.6
  Top Layer w10: U5_LORA2.6 6387.09,4072.68 Q1_LORA2.3 6458.82,4144.41 C14_LORA2.1 6458.82,4218.82 R8_LORA2.1
NetC15_LORA1_1: C15_LORA1.1 U5_LORA1.3 | length 42.9
  Top Layer w10: U5_LORA1.3 6309.09,5142.28 C15_LORA1.1
NetC15_LORA1_2: C15_LORA1.2 C16_LORA1.2 L2_LORA1.1 | length 110.7
  Top Layer w10: C16_LORA1.2 6234.09,5182.87 L2_LORA1.1 6234.09,5142.87 C15_LORA1.2
NetC15_LORA2_1: C15_LORA2.1 U5_LORA2.3 | length 42.9
  Top Layer w10: C15_LORA2.1 6328.82,4141.18 U5_LORA2.3
NetC15_LORA2_2: C15_LORA2.2 C16_LORA2.2 L2_LORA2.1 | length 110.7
  Top Layer w10: C15_LORA2.2 6329.41,4216.18 L2_LORA2.1 6369.41,4216.18 C16_LORA2.2
NetC17_LORA1_2: C17_LORA1.2 L3_LORA1.2 U5_LORA1.5 | length 214.8
  Top Layer w10: U5_LORA1.5 6393.09,5167.87 6394.09,5166.87 6459.56,5166.87 6490.56,5197.87 C17_LORA1.2 L3_LORA1.2
NetC17_LORA2_2: C17_LORA2.2 L3_LORA2.2 U5_LORA2.5 | length 264
  Top Layer w10: U5_LORA2.5@6358,4050 6358,4043.47 6366.79,4034.68 6403.77,4034.68 6483.5,4114.41 C17_LORA2.2 L3_LORA2.2
NetC19_LORA1_2: C19_LORA1.2 R7_LORA1.2 U5_LORA1.4 | length 190
  Top Layer w10: U5_LORA1.4 6453.68,5142.28 6464.09,5131.87 ; C19_LORA1.2 6474.09,5081.87 6469.09,5086.87 R7_LORA1.2 ; 6464.09,5131.87 6464.09,5107.87 R7_LORA1.2 ; 6464.09,5131.87 6469.09,5126.87 R7_LORA1.2
NetC19_LORA2_2: C19_LORA2.2 R7_LORA2.2 U5_LORA2.4 | length 100.2
  Top Layer w10: U5_LORA2.4 6328.82,4011.18 C19_LORA2.2 6335,4005 R7_LORA2.2
NetC20_LORA1_1: C20_LORA1.1 C21_LORA1.2 C23_LORA1.2 L5_LORA1.2 | length 118.3
  Top Layer w10: C20_LORA1.1 L5_LORA1.2 6404.09,5051.87 6409.09,5046.87 C21_LORA1.2 6424.09,5017.87 6444.09,5017.87 C23_LORA1.2
NetC20_LORA1_2: C20_LORA1.2 C24_LORA1.2 L5_LORA1.1 U5_LORA1.1 | length 213.3
  Top Layer w10: U5_LORA1.1 6338.09,5193.46 6339.09,5192.46 6339.09,5125.37 6356.59,5107.87 C20_LORA1.2 L5_LORA1.1 C24_LORA1.2
NetC20_LORA2_1: C20_LORA2.1 C21_LORA2.2 C23_LORA2.2 L5_LORA2.2 | length 118.3
  Top Layer w10: C23_LORA2.2 6204.41,4006.18 6204.41,4026.18 C21_LORA2.2 6233.41,4041.18 6238.41,4046.18 L5_LORA2.2 C20_LORA2.1
NetC20_LORA2_2: C20_LORA2.2 C24_LORA2.2 L5_LORA2.1 U5_LORA2.1 | length 213.3
  Top Layer w10: C24_LORA2.2 L5_LORA2.1 C20_LORA2.2 6294.41,4093.68 6311.91,4111.18 6379,4111.18 6380,4112.18 U5_LORA2.1
NetC21_LORA1_1: C21_LORA1.1 C22_LORA1.2 L6_LORA1.1 L7_LORA1.1 | length 140
  Top Layer w10: L6_LORA1.1 6348.09,5032.87 6359.09,5021.87 6359.09,4998.87 6360.09,4997.87 L7_LORA1.1 6388.09,4997.87 6393.09,4992.87 C21_LORA1.1 C22_LORA1.2
NetC21_LORA2_1: C21_LORA2.1 C22_LORA2.2 L6_LORA2.1 L7_LORA2.1 | length 140
  Top Layer w10: C22_LORA2.2 C21_LORA2.1 6179.41,4057.18 6184.41,4062.18 L7_LORA2.1 6184.41,4090.18 6185.41,4091.18 6208.41,4091.18 6219.41,4102.18 L6_LORA2.1
NetC25_LORA1_2: C25_LORA1.2 C26_LORA1.2 L7_LORA1.2 U6_LORA1.25 | length 136.3
  Top Layer w10: U6_LORA1.25 6235.09,5016.69 6253.91,4997.87 C25_LORA1.2 C26_LORA1.2 L7_LORA1.2
NetC25_LORA2_2: C25_LORA2.2 C26_LORA2.2 L7_LORA2.2 U6_LORA2.25 | length 136.3
  Top Layer w10: L7_LORA2.2 C26_LORA2.2 C25_LORA2.2 6184.41,4196.36 6203.23,4215.18 U6_LORA2.25
NetC31_1: C31.1 U7.6 | length 50.1
  Top Layer w10: U7.6 4665,4031.4 4664.95,4031.35 4664.95,4015.6 C31.1
NetC31_2: C31.2 L8.2 U7.2 | length 517.4
  Top Layer w10: U7.2 4627.6,4175 v1(4652.95,4200.35) ; C31.2 4732.01,3988.54 4764.06,3988.54 4779.76,4004.25 4779.76,4007.6 L8.2 v1(4842.95,4055.35)
  Bottom Layer w10: v1(4652.95,4200.35) 4797.95,4055.35 v1(4842.95,4055.35)
NetL2_LORA1_2: L2_LORA1.2 L4_LORA1.1 U6_LORA1.1 | length 96.4
  Top Layer w10: U6_LORA1.1 6165.28,5161.87 6166.28,5162.87 L2_LORA1.2 6194.09,5174.87 6184.09,5184.87 L4_LORA1.1
NetL2_LORA2_2: L2_LORA2.2 L4_LORA2.1 U6_LORA2.1 | length 96.4
  Top Layer w10: U6_LORA2.1 6348.41,4285 6349.41,4284 L2_LORA2.2 6361.41,4256.18 6371.41,4266.18 L4_LORA2.1
NetL6_LORA1_2: L6_LORA1.2 U6_LORA1.27 | length 130.7
  Top Layer w10: U6_LORA1.27 6210.31,5072.56 6334.09,5072.56 L6_LORA1.2
NetL6_LORA2_2: L6_LORA2.2 U6_LORA2.27 | length 130.7
  Top Layer w10: U6_LORA2.27 6259.1,4239.96 6259.1,4116.18 L6_LORA2.2
NetLED1_1: LED1.1 R12.2
NetQ1_LORA1_1: Q1_LORA1.1 R9_LORA1.2 | length 86.5
  Top Layer w10: Q1_LORA1.1 6531.59,5160.47 6544.09,5147.97 R9_LORA1.2
NetQ1_LORA2_1: Q1_LORA2.1 R9_LORA2.2 | length 38
  Top Layer w10: Q1_LORA2.1 6510,4074.57 R9_LORA2.2
NetR6_1: R6.1 U1.31 | length 142.6
  Top Layer w8: R6.1 4590.79,5319.21 U1.31
NetR10_1: R10.1 S1.1 | length 35
  Top Layer w10: v1(4435,5445) R10.1
NetR11_1: R11.1 S2.1
NetR13_1: R13.1 U7.5 | length 51.1
  Top Layer w10: U7.5 4627.6,4031.35 4630.2,4028.76 R13.1
NetR14_2: R14.2 R15.1 R16.1
NetR15_2: R15.2 U7.4 | length 258
  Top Layer w10: v1(4552.95,4055.35) 4580.2,4055.35 U7.4
  Bottom Layer w10: v1(4552.95,4055.35) 4712.95,4055.35 v1(4752.95,4015.35)
nRESET: C1.1 R1.1 R10.2 U1.32 U3.3 U6_LORA1.7 U6_LORA2.7 | length 1182.9
  Top Layer w8: R1.1 4510,5360.2 4571.1,5299.1 U1.32
  Top Layer w10: v1(4440,5405) R10.2 C1.1 4505,5391 4510,5386 R1.1 ; U3.3@5083.58,5412.6 5086.18,5410 v1(5130,5410) ; v1(5919.09,5122.87) 5930.04,5133.82 U6_LORA1.7 ; v1(6309.41,4531.18) 6320.36,4520.23 U6_LORA2.7
  Bottom Layer w10: v1(4440,5405) 5125,5405 v1(5130,5410)
RTS: P1.2 U3.2 U4.1 | length 285.8
  Top Layer w10: U4.1 5159.8,5375.2 P1.2
RX: P1.4 U1.25 | length 643.3
  Top Layer w8: U1.25 4759.01,5248.43 4786.39,5275.81 4824.31,5275.81 4848.5,5300 5047.49,5300 5100.81,5246.68 5100.81,5164.19 5140,5125 P1.4
RXTX/RFMODE_LORA1: R7_LORA1.1 R9_LORA1.1 U6_LORA1.20 | length 579.8
  Top Layer w10: U6_LORA1.20 6144.37,4894.88 6144.37,4869.8 6177.39,4869.8 6190.46,4882.87 v1(6229.09,4882.87) ; R7_LORA1.1 6509.09,5067.87 v1(6514.09,5062.87) R9_LORA1.1
  Bottom Layer w10: v1(6229.09,4882.87) 6229.09,4927.87 6364.09,5062.87 v1(6514.09,5062.87)
RXTX/RFMODE_LORA2: R7_LORA2.1 R9_LORA2.1 U6_LORA2.20 | length 688.2
  Top Layer w10: v1(6069.41,4221.18) 6069.41,4259.81 6056.34,4272.88 6056.34,4305.9 6081.42,4305.9 U6_LORA2.20 ; R7_LORA2.1 v1(6455,4005) 6470,4020 R9_LORA2.1
  Bottom Layer w10: v1(6069.41,4221.18) 6285.59,4005 v1(6455,4005)
TX: P1.3 U1.26 | length 601.9
  Top Layer w8: U1.26 4689.98,5249.19 4689.98,5272.63 4711.15,5293.81 4816.85,5293.81 4841.04,5318 5062,5318 5155,5225 P1.3
VCC3V3: C11_LORA1.2 C11_LORA2.2 C12_LORA1.1 C12_LORA2.1 C27_LORA1.1 C27_LORA2.1 C28_LORA1.2 C28_LORA2.2 C29_LORA1.2 C29_LORA2.2 R8_LORA1.2 R8_LORA2.2 U6_LORA1.3 U6_LORA1.14 U6_LORA1.24 U6_LORA2.3 U6_LORA2.14 U6_LORA2.24 | length 3886.9
  Top Layer w10: U6_LORA1.14 5971.14,4939.92 C27_LORA1.1 ; U6_LORA1.3 6114.09,5229.09 6075.31,5267.87 C12_LORA1.1 ; U6_LORA2.14 6126.46,4479.13 C27_LORA2.1 ; U6_LORA2.24 6177.64,4224.41 6164.41,4211.18 6163.16,4211.18 6149.41,4197.43 C28_LORA2.2 C29_LORA2.2 6134.41,4151.18 6134.41,4134.97 6125.62,4126.18 6078.5,4126.18 5986.12,4218.56 5986.12,4442 6000,4455.88 6000,4517.6 6048.89,4566.49 6071.11,4566.49 6099.41,4538.19 C27_LORA2.1 ; U6_LORA1.24 6225.86,4991.1 6239.09,4977.87 6239.09,4976.62 6252.84,4962.87 C28_LORA1.2 C29_LORA1.2 6299.09,4947.87 6315.31,4947.87 6324.09,4939.09 6324.09,4891.96 6231.71,4799.58 6008.27,4799.58 5994.39,4813.46 5932.68,4813.46 5883.78,4862.36 5883.78,4884.57 5912.09,4912.87 C27_LORA1.1 ; U6_LORA2.3 6415.62,4336.18 C12_LORA2.1@6454.41,4374.97 ; R8_LORA1.2 6079.09,5272.87 C12_LORA1.1 ; R8_LORA2.2 6460,4369.38 C12_LORA2.1@6454.41,4374.97 ; C27_LORA1.1 5823.78,5033.18 5823.78,5104.57 5825.59,5106.38 5825.59,5293.46 5874.69,5342.56 6035.62,5342.56 6059.09,5319.09 6059.09,5302.87 C11_LORA1.2 C12_LORA1.1 ; C27_LORA2.1 6219.72,4626.49 6291.11,4626.49 6292.92,4624.68 6480,4624.68 6529.1,4575.58 6529.1,4414.65 6505.62,4391.18 6489.41,4391.18 C11_LORA2.2 C12_LORA2.1 C12_LORA2.1@6454.41,4374.97
VDD3V3: C2.1 C5.1 C32.1 L8.1 R1.2 R2.2 R3.2 R5.2 R12.1 R14.1 U1.1 U1.3 U1.4 U1.11 U1.17 U1.29 U1.30 U2.3 U2.7 U2.8 | length 1800
  Top Layer w8: R2.2 4475.47,5179.53 U1.3@4541,5179.53 ; R1.2 4541.57,5298.43 U1.1 ; U1.4 4541,5159.84 U1.3@4541,5179.53 ; U1.3 U1.3@4541,5179.53 ; R5.2@4604.19,4930.81 4604.19,5010.69 4610.47,5016.97 U1.11 ; U1.30 4610.47,5248 4630.16,5248 U1.29 ; U1.17 4745,5081.1 4750.29,5075.81 4750.69,5075.81 4765.81,5060.69 4765.81,5030.81 R3.2
  Top Layer w10: C2.1 R1.2 ; R5.2@4604.19,4930.81 R5.2 4603.79,4930 4580,4906.21 4580,4873.79 4590,4863.79 4590,4860 4650,4860 4746.81,4956.81 R3.2@4746.81,5000 ; R3.2@4745,5000 R3.2@4746.81,5000 ; R3.2 4746.81,5008.19 R3.2@4746.81,5000 ; R3.2@4750,5010 4849.61,5010 4902.41,4957.2 4987.2,4957.2 5025,4995 U2.3 5025,5080 ; R14.1 4780.71,4113.11 L8.1 4772.71,4183.35 C32.1 ; U2.8 U2.7 4975,5170 5025,5120 5025,5080 ; C5.1 5030,5075 5025,5080
VDD5V: C30.1 J3.1 R13.2 U7.3 | length 498.8
  Top Layer w10: J3.1 4552.84,4195 C30.1 4613.2,4196.18 4601.77,4184.76 4601.77,4161.57 U7.3 4590.2,4108.9 4568.58,4108.9 4526.14,4066.46 4526.14,4044.25 4548.58,4021.81 4590.2,4021.81 R13.2
pads on no net: J3.3 U1.5 U6_LORA1.21 U6_LORA1.22 U6_LORA1.28 U6_LORA2.21 U6_LORA2.22 U6_LORA2.28

## Polygon pours and split planes (outlines as drawn)
GND on Top Layer "Bottom Solder-No Net" (solid, pour order 37): 4335,5041 4335,5416 3975,5416 3975,5041
GND on Top Layer "Bottom Solder-No Net" (solid, pour order 28): 6620,4375 6620,4000 6980,4000 6980,4375
GND on Top Layer "Bottom Solder-No Net" (solid, pour order 29): 6615.59,5423.46 6615.59,5048.46 6975.59,5048.46 6975.59,5423.46
GND on Bottom Layer "Bottom Solder-No Net" (solid, pour order 39): 4335,5041 3975,5041 3975,5416 4335,5416
GND on Bottom Layer "Bottom Solder-No Net" (solid, pour order 31): 6615.59,5423.46 6975.59,5423.46 6975.59,5048.46 6615.59,5048.46
GND on Bottom Layer "Bottom Solder-No Net" (solid, pour order 30): 6620,4375 6980,4375 6980,4000 6620,4000

## Keep-outs
Keep-Out Layer:
  the board outline again, w10

## Other copper
Top Layer:
  pour cut-out: 4172.23,5311.24 4188.45,5306.32 4203.4,5298.33 4216.5,5287.58 4227.26,5274.47 4235.25,5259.52 4240.17,5243.3 4241.83,5226.43 4240.17,5209.57 4235.25,5193.34 4227.26,5178.4 4216.5,5165.29 4203.4,5154.54 4188.45,5146.55 4172.23,5141.63 4155.36,5139.97 4138.49,5141.63 4122.27,5146.55 4107.32,5154.54 4094.22,5165.29 4083.47,5178.4 4075.48,5193.34 4070.56,5209.57 4068.9,5226.43 4070.56,5243.3 4075.48,5259.52 4083.47,5274.47 4094.22,5287.58 4107.32,5298.33 4122.27,5306.32 4138.49,5311.24 4155.36,5312.9
  pour cut-out: 6816.74,4275 6832.96,4270.08 6847.91,4262.09 6861.01,4251.34 6871.76,4238.23 6879.75,4223.28 6884.68,4207.06 6886.34,4190.19 6884.68,4173.32 6879.75,4157.1 6871.76,4142.16 6861.01,4129.05 6847.91,4118.3 6832.96,4110.31 6816.74,4105.39 6799.87,4103.73 6783,4105.39 6766.78,4110.31 6751.83,4118.3 6738.73,4129.05 6727.97,4142.16 6719.98,4157.1 6715.06,4173.32 6713.4,4190.19 6715.06,4207.06 6719.98,4223.28 6727.97,4238.23 6738.73,4251.34 6751.83,4262.09 6766.78,4270.08 6783,4275 6799.87,4276.66
  pour cut-out: 6811.9,5322.38 6828.12,5317.46 6843.07,5309.47 6856.17,5298.71 6866.92,5285.61 6874.92,5270.66 6879.84,5254.44 6881.5,5237.57 6879.84,5220.7 6874.92,5204.48 6866.92,5189.53 6856.17,5176.43 6843.07,5165.68 6828.12,5157.69 6811.9,5152.77 6795.03,5151.1 6778.16,5152.77 6761.94,5157.69 6746.99,5165.68 6733.89,5176.43 6723.13,5189.53 6715.14,5204.48 6710.22,5220.7 6708.56,5237.57 6710.22,5254.44 6715.14,5270.66 6723.13,5285.61 6733.89,5298.71 6746.99,5309.47 6761.94,5317.46 6778.16,5322.38 6795.03,5324.04

## Silkscreen, mask and mechanical layers (free items; w line width, h text height)
Drill Guide:
  circle w0: c4155,5226 r90.55
  circle w0: c6800,4190 r90.55
  circle w0: c6795.59,5238.46 r90.55
  pour cut-out: 6725,0 6725,1 6725,2 6725,3 6725,4 6725,5 6725,6 6725,7 6725,8 6725,9 6725,10 6725,11 6725,12 6725,13 6725,14 6725,15 6725,16 6725,17 6725,18 6725,19 6725,20 6725,21 6725,22 6725,23 6725,24 6725,25 6725,26 6725,27 6725,28 6725,29 6725,30 6725,31

## Text inside footprints (layer, text, board x,y; h text height)
J3: Mechanical 13 "PCB Edge" at 4059,4340 h9.84 r270
LED1: Top Overlay "+" at 4350,4740 h60 r270